# Altium PCB AT long bus with break-away tab (13.3 x 4.8 inches).PCBDOC
Units mil, origin at the board's own origin, x right, y up, seen from the top; angles counter-clockwise.
Board outline 13300 x 5550 mil, 10 copper layers (TopLayer, MidLayer1, MidLayer2, MidLayer3, MidLayer4, MidLayer5, MidLayer6, MidLayer7, MidLayer8, BottomLayer); 1 components, 0 nets, 137 pads, 0 vias.
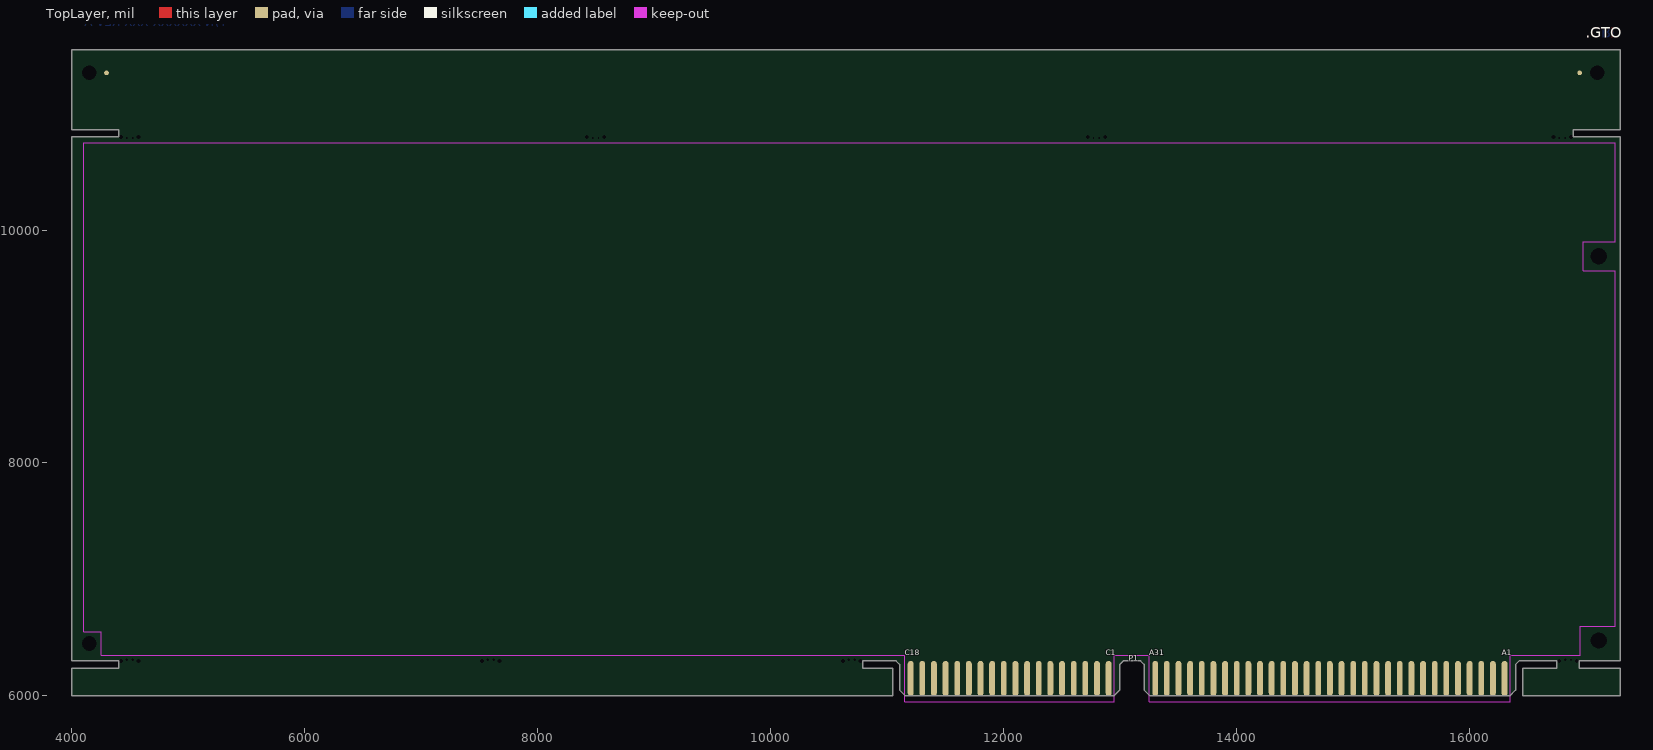
[diagram p0: TopLayer view]
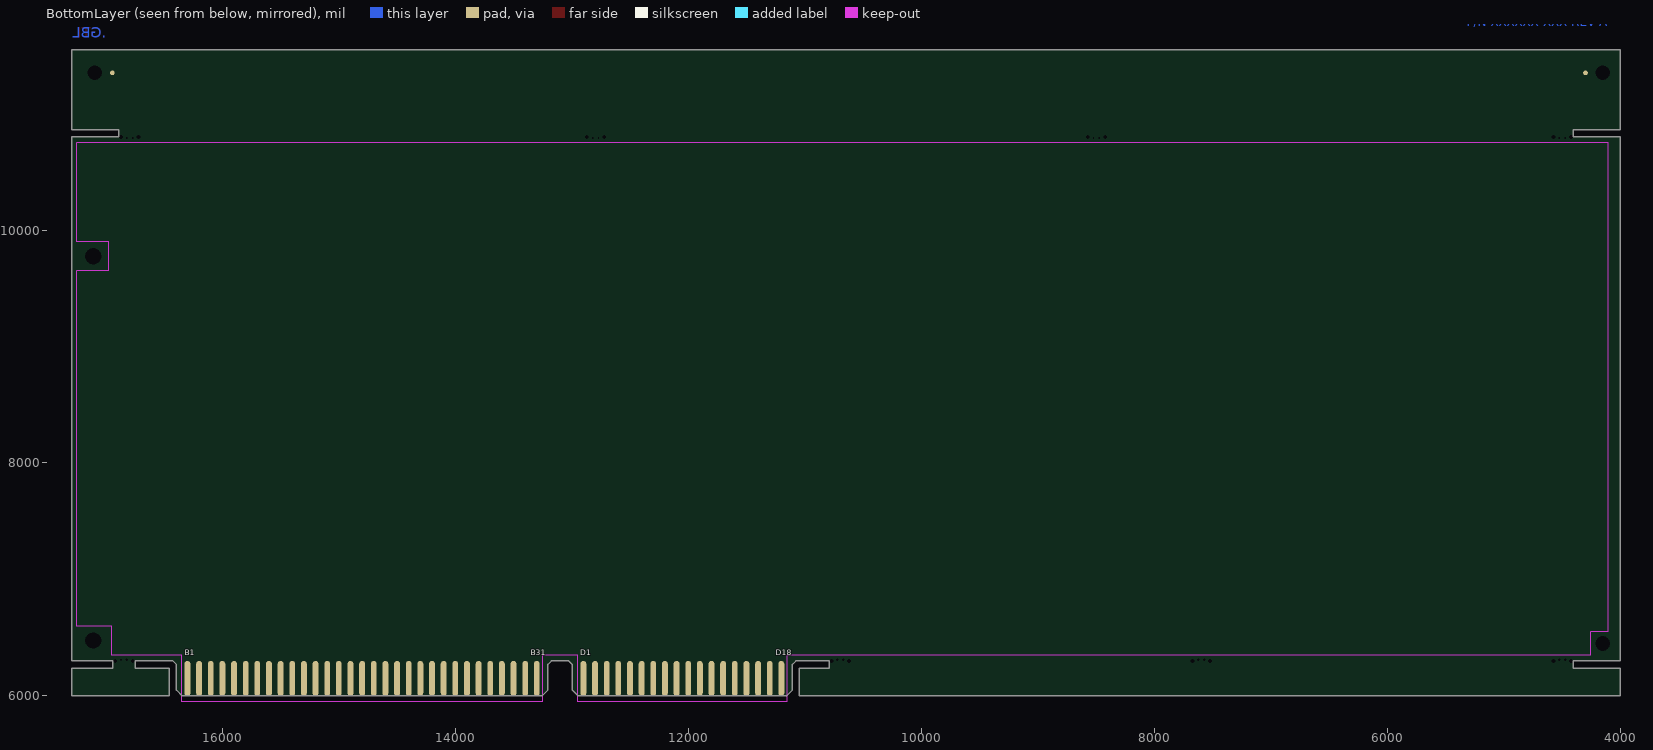
[diagram p1: BottomLayer view, seen from below]
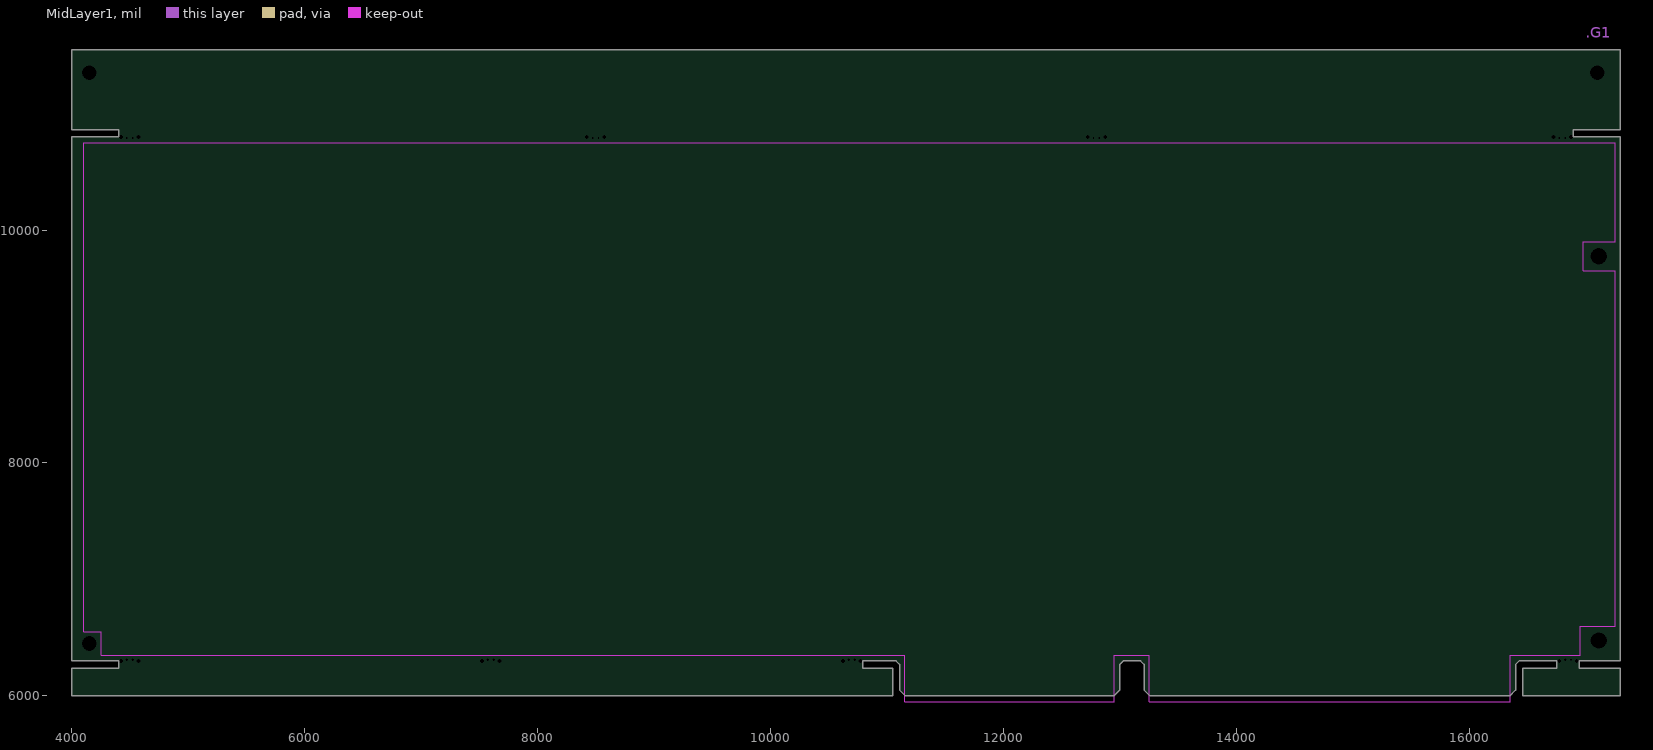
[diagram p2: MidLayer1]
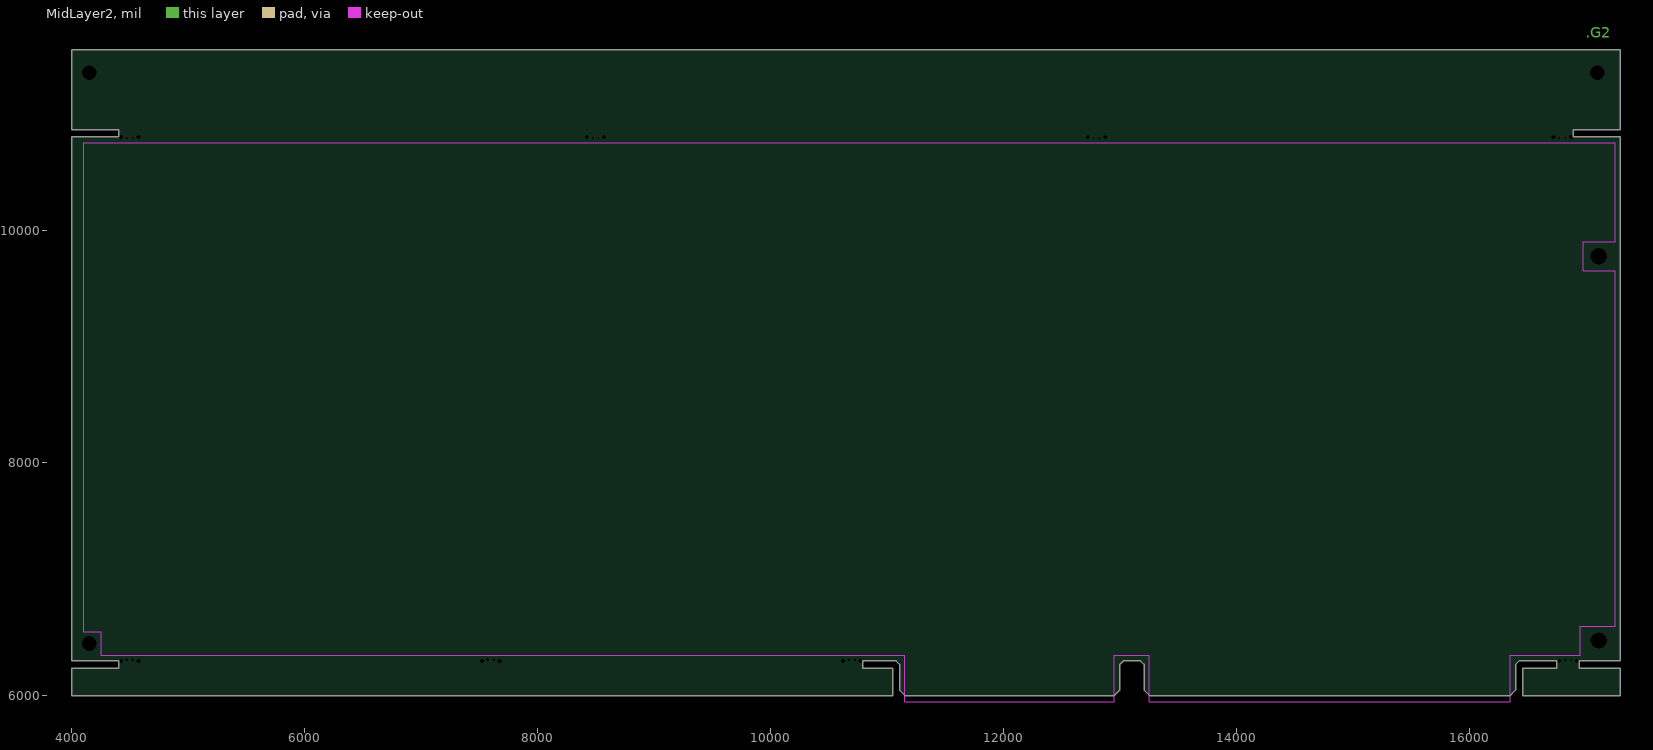
[diagram p3: MidLayer2]
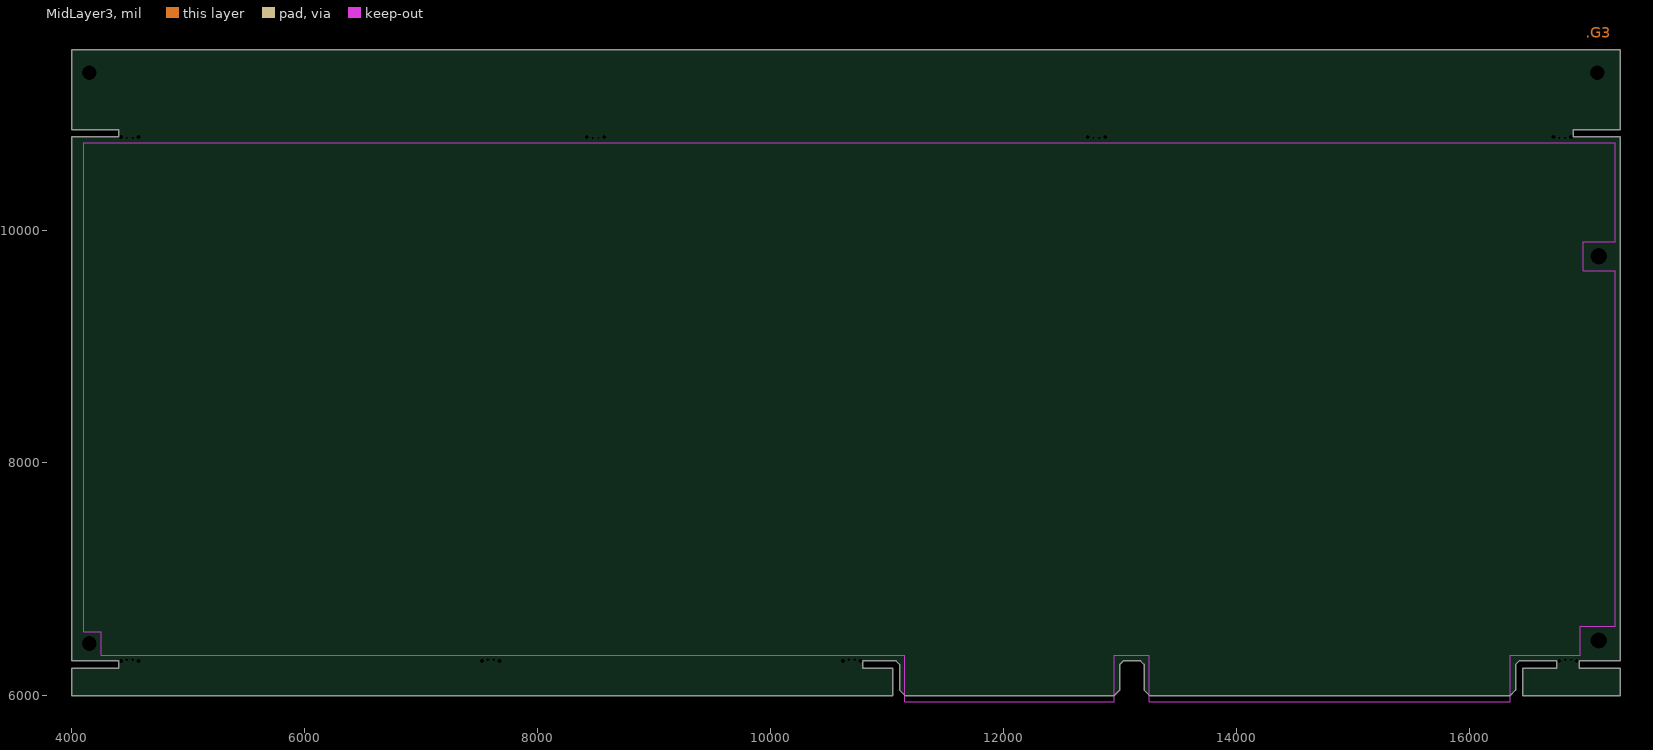
[diagram p4: MidLayer3]
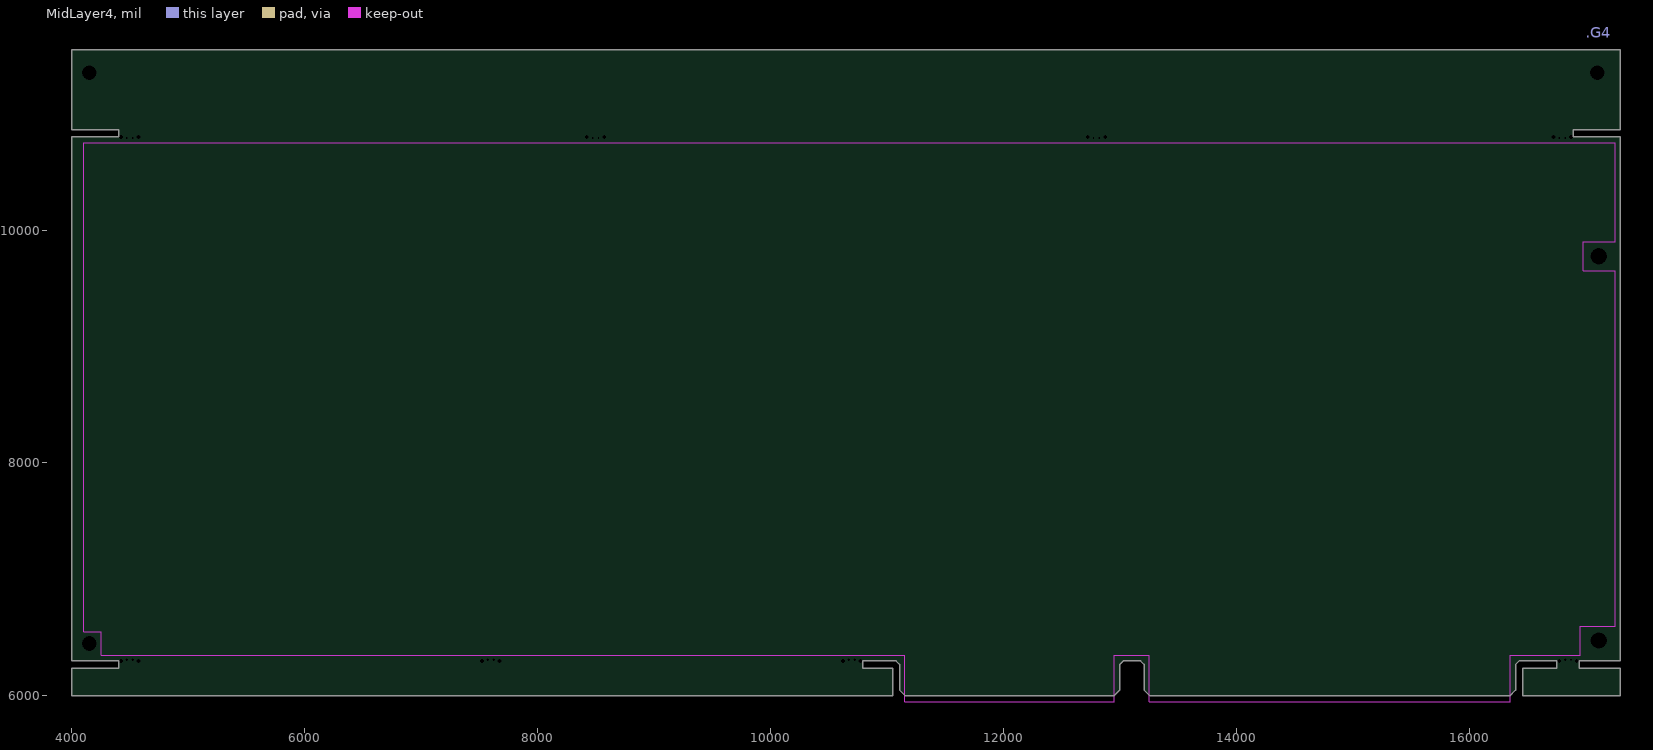
[diagram p5: MidLayer4]
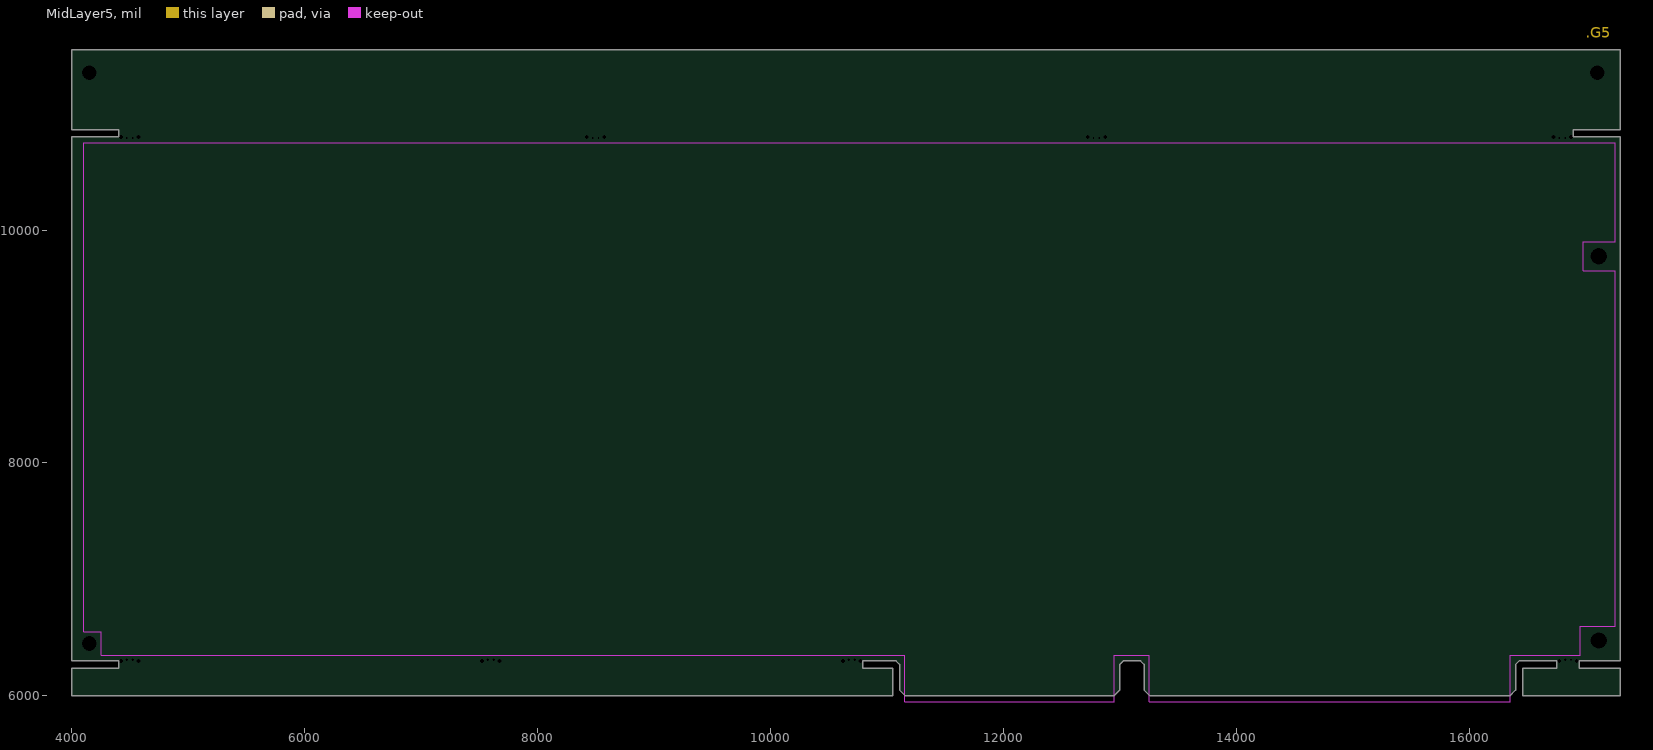
[diagram p6: MidLayer5]
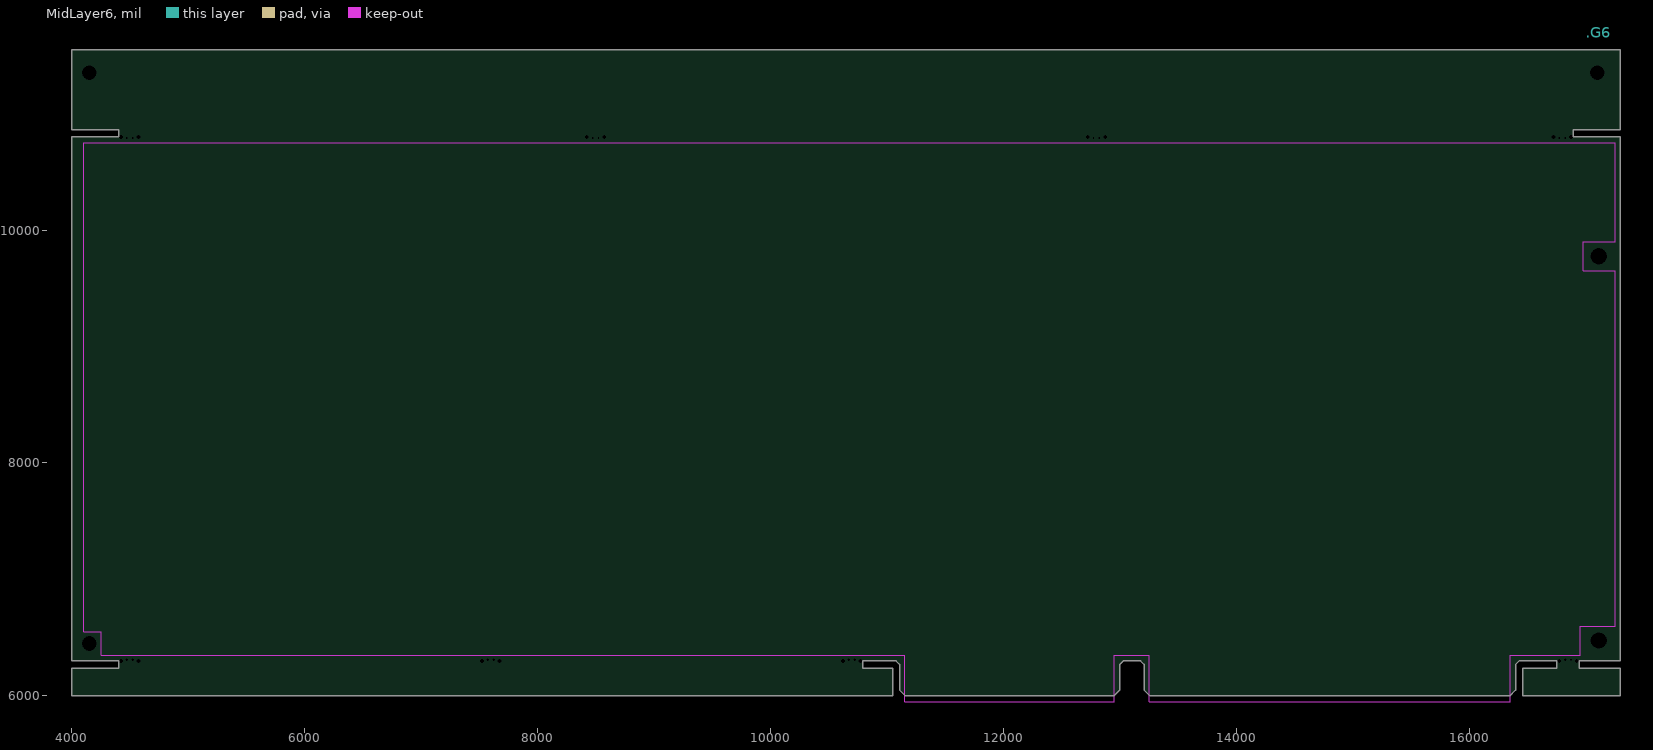
[diagram p7: MidLayer6]
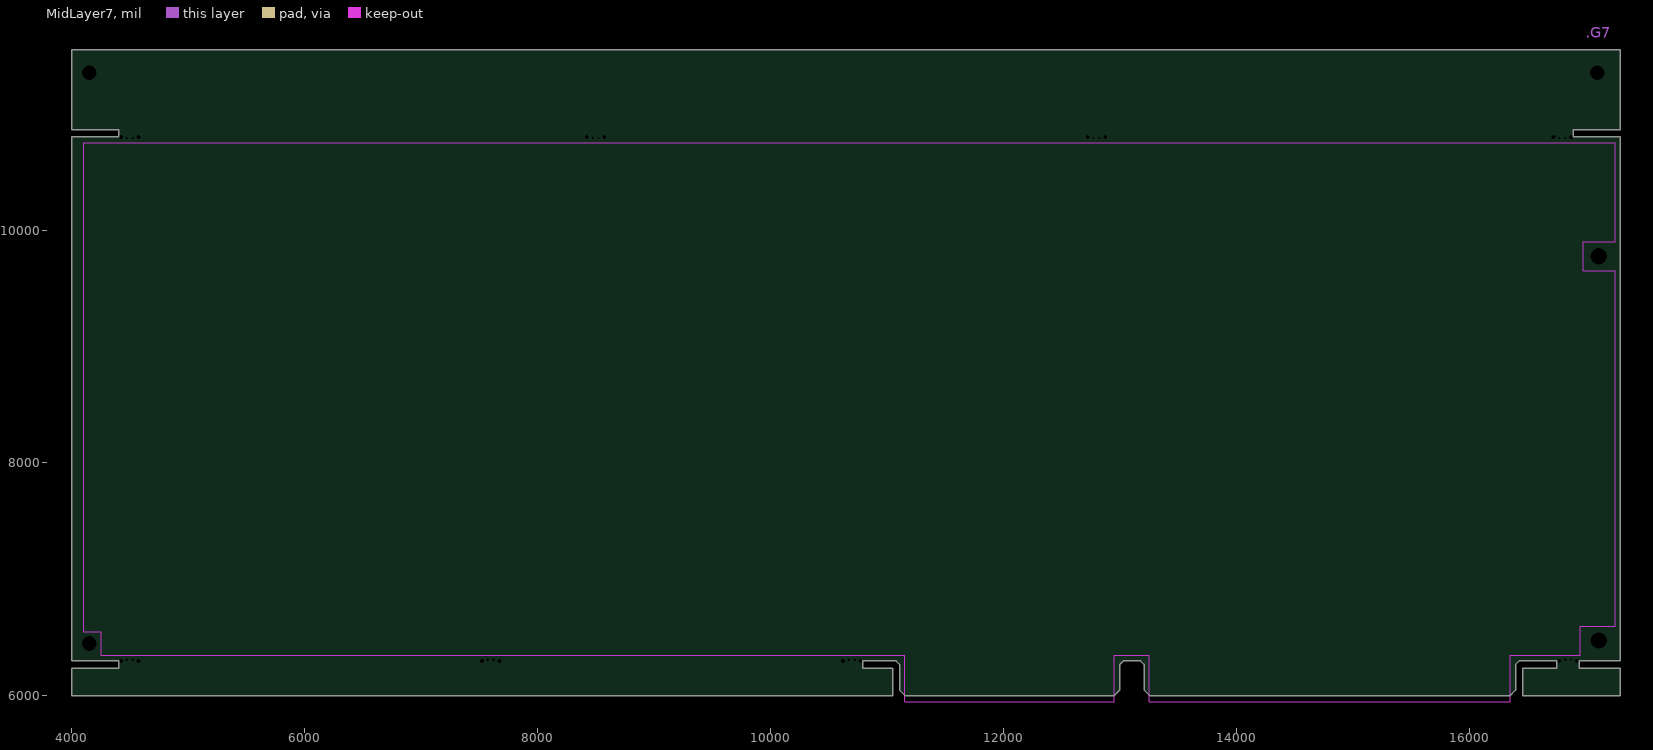
[diagram p8: MidLayer7]
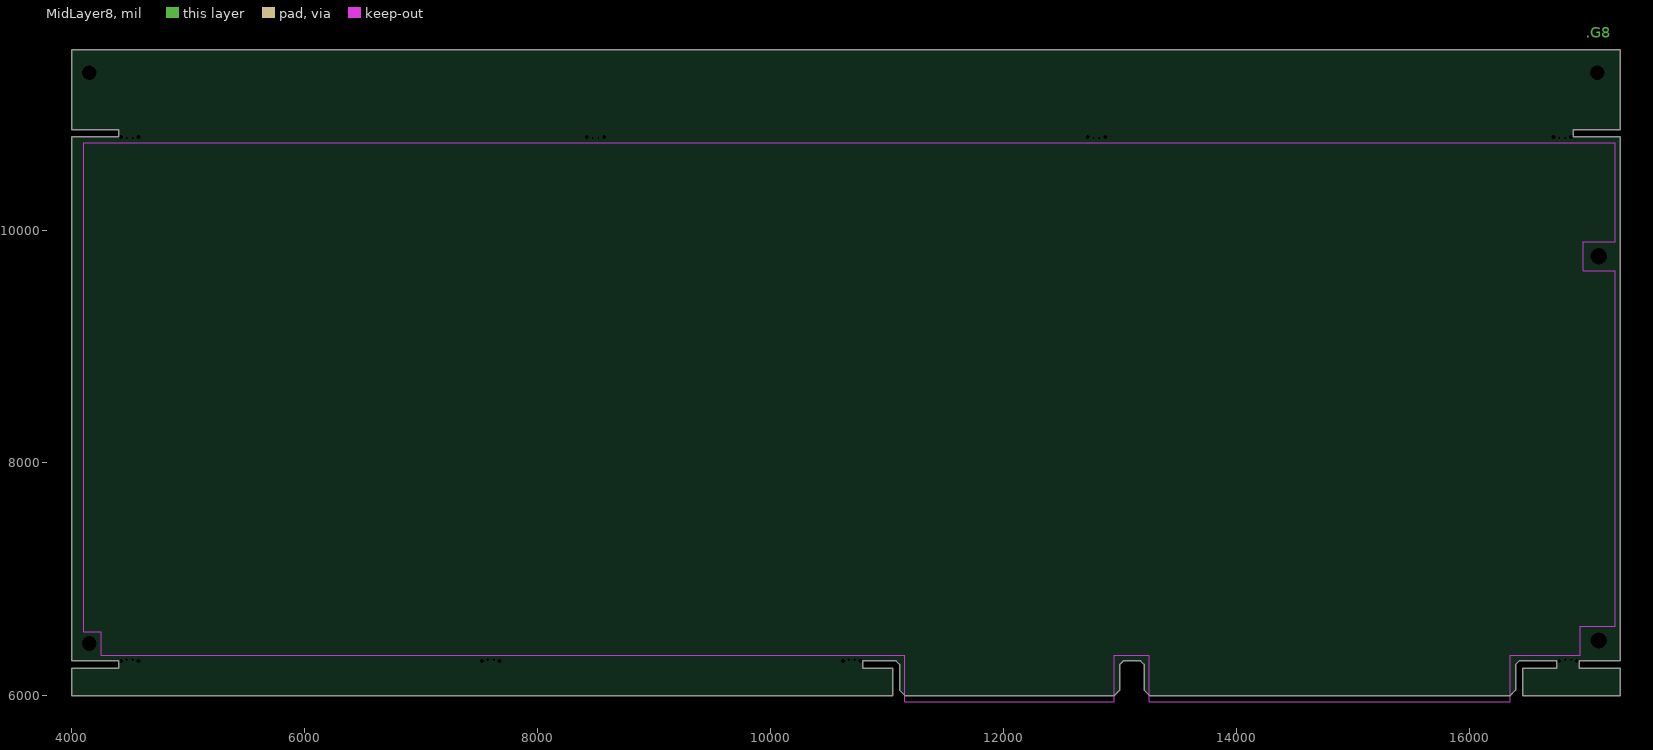
[diagram p9: MidLayer8]

## Layer stack, top to bottom
TopLayer: signal copper 1.4
Dielectric: core 12.6, FR-4, Dk 4.8
MidLayer1: signal copper 1.4
Dielectric: prepreg 12.6, FR-4, Dk 4.8
MidLayer2: signal copper 1.4
Dielectric: core 12.6, FR-4, Dk 4.8
MidLayer3: signal copper 1.4
Dielectric: prepreg 12.6, FR-4, Dk 4.8
MidLayer4: signal copper 1.4
Dielectric: core 12.6, FR-4, Dk 4.8
MidLayer5: signal copper 1.4
Dielectric: prepreg 12.6, FR-4, Dk 4.8
MidLayer6: signal copper 1.4
Dielectric: core 12.6, FR-4, Dk 4.8
MidLayer7: signal copper 1.4
Dielectric: prepreg 12.6, FR-4, Dk 4.8
MidLayer8: signal copper 1.4
Dielectric: core 12.6, FR-4, Dk 4.8
BottomLayer: signal copper 1.4

## Board outline
4000,6000 11050,6000 11050,6238 10795,6238 10795,6300 11080,6300 11110,6270 11110,6050 11160,6000 12950,6000 13000,6050 13000,6270 13030,6300 13180,6300 13210,6270 13210,6050 13260,6000 16350,6000 16400,6050 16400,6270 16430,6300 16755,6300 16755,6238 16462,6238 16462,6000 17300,6000 17300,6238 16945,6238 16945,6300 17300,6300 17300,10800 16895,10800 16895,10860 17300,10860 17300,11550 4000,11550 4000,10862 4405,10862 4405,10800 4000,10800 4000,6300 4405,6300 4405,6238 4000,6238

## Design rules (kind name [scope] priority, off if disabled: settings)
Clearance [All] p1: gap=10
FabricationTestPointUsage TestPointUsage [All] p1: valid=0 allowmultiple=FALSE
FabricationTestpoint Testpoint [All] p1: side=3 testpointundercomponent=TRUE minsize=40 maxsize=100 preferedsize=60 minholesize=20 maxholesize=40 preferedholesize=32 testpointgrid=1 allowsidetop=TRUE allowsidebottom=TRUE usegrid=TRUE gridtolerance=0.01
PasteMaskExpansion PasteMaskExpansion_1 [InComponent('P1')] p1: expansion=-150
PasteMaskExpansion [All] p2: expansion=0
PlaneClearance [All] p1: clearance=10
PolygonConnect [All] p1: connectstyle=Relief reliefconductorwidth=10 reliefentries=4 polygonreliefangle="90 Angle"
RoutingVias [All] p1: holewidth=28 width=50 viastyle="Through Hole" minholewidth=28 minwidth=50 maxholewidth=28 maxwidth=50
SilkscreenOverComponentPads [All] p1: minsilkscreentomaskgap=10
SolderMaskExpansion SolderMaskExpansion_1 [HasPad('Free-34')] p1: expansion=20
SolderMaskExpansion [HasPad('Free-33')] p2: expansion=20
SolderMaskExpansion SolderMaskExpansion_2 [All] p3: expansion=2
Width [All] p1: maxlimit=10 minlimit=10 preferedwidth=10
23 further rules are at their usual default settings.

## Components (designator, comment, footprint, x,y, rotation, side; value= is the part's Value field where it differs from the comment)
P1 "PCATEDGE" PCATEDGE 16305,6150 r0 top locked

## Footprints (in the part's own frame and the unit in brackets; to place one, negate y for a bottom-side part, rotate by r counter-clockwise, add the part's x,y. Pads: shape width x height; smd on the part's side, far side on the other; paste and mask are expansions set on the pad)
PCATEDGE [mil]
  oval 50x300 smd: A1(0,0) A2(-100,0) A3(-200,0) A4(-300,0) A5(-400,0) A6(-500,0) A7(-600,0) A8(-700,0) A9(-800,0) A10(-900,0) A11(-1000,0) A12(-1100,0) A13(-1200,0) A14(-1300,0) A15(-1400,0) A16(-1500,0) A17(-1600,0) A18(-1700,0) A19(-1800,0) A20(-1900,0) A21(-2000,0) A22(-2100,0) A23(-2200,0) A24(-2300,0) A25(-2400,0) A26(-2500,0) A27(-2600,0) A28(-2700,0) A29(-2800,0) A30(-2900,0) A31(-3000,0) C1(-3400,0) C2(-3500,0) C3(-3600,0) C4(-3700,0) C5(-3800,0) C6(-3900,0) C7(-4000,0) C8(-4100,0) C9(-4200,0) C10(-4300,0) C11(-4400,0) C12(-4500,0) C13(-4600,0) C14(-4700,0) C15(-4800,0) C16(-4900,0) C17(-5000,0) C18(-5100,0)
  oval 50x300 smd far side: B1(0,0) B2(-100,0) B3(-200,0) B4(-300,0) B5(-400,0) B6(-500,0) B7(-600,0) B8(-700,0) B9(-800,0) B10(-900,0) B11(-1000,0) B12(-1100,0) B13(-1200,0) B14(-1300,0) B15(-1400,0) B16(-1500,0) B17(-1600,0) B18(-1700,0) B19(-1800,0) B20(-1900,0) B21(-2000,0) B22(-2100,0) B23(-2200,0) B24(-2300,0) B25(-2400,0) B26(-2500,0) B27(-2600,0) B28(-2700,0) B29(-2800,0) B30(-2900,0) B31(-3000,0) D1(-3400,0) D2(-3500,0) D3(-3600,0) D4(-3700,0) D5(-3800,0) D6(-3900,0) D7(-4000,0) D8(-4100,0) D9(-4200,0) D10(-4300,0) D11(-4400,0) D12(-4500,0) D13(-4600,0) D14(-4700,0) D15(-4800,0) D16(-4900,0) D17(-5000,0) D18(-5100,0)

## Free pads (board coordinates)
  round 0 hole 32: 1(4575,6300) 4(4425,6300) 5(7675,6300) 8(7525,6300) 9(10775,6300) 12(10625,6300) 13(16925,6300) 16(16775,6300) 17(4425,10800) 20(4575,10800) 21(8425,10800) 24(8575,10800) 25(12725,10800) 28(12875,10800) 29(16725,10800) 32(16875,10800)
  round 0 hole 20: 2(4525,6310) 3(4475,6310) 6(7625,6310) 7(7575,6310) 10(10725,6310) 11(10675,6310) 14(16875,6310) 15(16825,6310) 18(4475,10790) 19(4525,10790) 22(8475,10790) 23(8525,10790) 26(12775,10790) 27(12825,10790) 30(16775,10790) 31(16825,10790)
  round 40 / inner round 0 / far side round 40 all layers, no hole: 33(4300,11350) 34(16950,11350)
  round 50 hole 140: 35(17115,6475) 36(17115,9775)
  round 50 hole 125: 37(17100,11350) 38(4150,11350) 39(4150,6450)

## Nets (pads, with @x,y where several pads share a name; then routed paths per layer and width w, separated by ;. In a path a pad name is that pad's centre, name@x,y a point inside that pad or via, vN(x,y) a via of type N, cw(c..) or ccw(c..) an arc to the next point about the centre after c; other vN are vias at no path point)
pads on no net: P1.A1 P1.A2 P1.A3 P1.A4 P1.A5 P1.A6 P1.A7 P1.A8 P1.A9 P1.A10 P1.A11 P1.A12 P1.A13 P1.A14 P1.A15 P1.A16 P1.A17 P1.A18 P1.A19 P1.A20 P1.A21 P1.A22 P1.A23 P1.A24 P1.A25 P1.A26 P1.A27 P1.A28 P1.A29 P1.A30 P1.A31 P1.B1 P1.B2 P1.B3 P1.B4 P1.B5 P1.B6 P1.B7 P1.B8 P1.B9 P1.B10 P1.B11 P1.B12 P1.B13 P1.B14 P1.B15 P1.B16 P1.B17 P1.B18 P1.B19 P1.B20 P1.B21 P1.B22 P1.B23 P1.B24 P1.B25 P1.B26 P1.B27 P1.B28 P1.B29 P1.B30 P1.B31 P1.C1 P1.C2 P1.C3 P1.C4 P1.C5 P1.C6 P1.C7 P1.C8 P1.C9 P1.C10 P1.C11 P1.C12 P1.C13 P1.C14 P1.C15 P1.C16 P1.C17 P1.C18 P1.D1 P1.D2 P1.D3 P1.D4 P1.D5 P1.D6 P1.D7 P1.D8 P1.D9 P1.D10 P1.D11 P1.D12 P1.D13 P1.D14 P1.D15 P1.D16 P1.D17 P1.D18

## Keep-outs
KeepOutLayer:
  lines w8: 4105,6550 4105,10750 17255,10750 17255,9900 16980,9900 16980,9650 17255,9650 17255,6600 16955,6600 16955,6350 16355,6350 16355,5950 13255,5950 13255,6350 12955,6350 12955,5950 11155,5950 11155,6350 4255,6350 4255,6550 4105,6550

## Other copper
TopLayer:
  text ".GTL" at 17000,11650 h90
MidLayer1:
  text ".G1" at 17000,11650 h90
MidLayer2:
  text ".G2" at 17000,11650 h90
MidLayer3:
  text ".G3" at 17000,11650 h90
MidLayer4:
  text ".G4" at 17000,11650 h90
MidLayer5:
  text ".G5" at 17000,11650 h90
MidLayer6:
  text ".G6" at 17000,11650 h90
MidLayer7:
  text ".G7" at 17000,11650 h90
MidLayer8:
  text ".G8" at 17000,11650 h90
BottomLayer:
  text "P/N XXXXXX-XXX REV A" at 5320,11750 h75
  text ".GBL" at 17000,11650 h90

## Silkscreen, mask and mechanical layers (free items; w line width, h text height)
TopOverlay:
  rectangle: 4281,11953 5031,12153
  rectangle: 4281,12243 5031,12443
  lines w10: 5392.59,12345.97 ccw(c5441,12385.5) 5392.71,12345.83
  text "C" at 5496,12348 h60
  text "2002 COMPANY NAME" at 5646,12348 h75
  text "S/N" at 4031,12300.5 h75
  text "BOARD NAME" at 5496,12173 h75
  text "ASSY NO.: XXXXXX" at 5496,12023 h75
  text "REV" at 4031,12003 h75
  text ".GTO" at 17000,11650 h90
TopPaste:
  text ".GTP" at 17000,11650 h90
BottomPaste:
  text ".GBP" at 17000,11650 h90
TopSolder:
  rectangle: 11085,5975 13025,6305
  rectangle: 13185,5975 16425,6305
  text ".GTS" at 17000,11650 h90
BottomSolder:
  rectangle: 11085,5975 13025,6305
  rectangle: 13185,5975 16425,6305
  text ".GBS" at 17000,11650 h90
Mechanical1:
  lines w20: 4000,6000 4000,6238 4405,6238 4405,6300 4000,6300 4000,10800 4405,10800 4405,10862 4000,10862 4000,11550 17300,11550 17300,10860 16895,10860 16895,10800 17300,10800 17300,6300 16945,6300 16945,6238 17300,6238 17300,6000 16462,6000 16462,6238 16755,6238 16755,6300 16430,6300 16400,6270 16400,6050 16350,6000 13260,6000 13210,6050 13210,6270 13180,6300 13030,6300 13000,6270 13000,6050 12950,6000 11160,6000 11110,6050 11110,6270 11080,6300 10795,6300 10795,6238 11050,6238 11050,6000 4000,6000 ; 4595,6238 4595,6300 7505,6300 7505,6238 4595,6238 ; 4595,10800 4595,10862 8405,10862 8405,10800 4595,10800 ; 7695,6238 7695,6300 10605,6300 10605,6238 7695,6238 ; 8595,10800 8595,10862 12705,10862 12705,10800 8595,10800 ; 12895,10800 12895,10862 16705,10862 16705,10800 12895,10800
Mechanical3:
  lines w10: 16990,6425 16990,6375 17040,6375 ; 16990,6450 16990,6500 ; 16990,6525 16990,6575 17040,6575 ; 16990,9725 16990,9675 17040,9675 ; 16990,9750 16990,9800 ; 16990,9825 16990,9875 17040,9875 ; 17065,6375 17115,6375 ; 17065,6575 17115,6575 ; 17065,9675 17115,9675 ; 17065,9875 17115,9875 ; 17140,6375 17190,6375 ; 17140,6575 17190,6575 ; 17140,9675 17190,9675 ; 17140,9875 17190,9875 ; 17215,6375 17265,6375 ; 17215,6575 17265,6575 ; 17215,9675 17265,9675 ; 17215,9875 17265,9875 ; 17300,6375 17340,6375 17340,5225 17365,5225 17365,9950 17790,9950 17790,9975 17340,9975 17340,9875 17300,9875 ; 17300,6575 17340,6575 17340,9675 17300,9675
Mechanical4:
  circle w10: c11165.68,6020.67 r100
  lines w10: 18405,8100 18480,8025 18555,8100 18630,8025 18705,8100 18780,8025 18855,8100 ; 18886.25,7018.75 19130,6775 19330,6775 ; 20030,8225 20755,8225 ; 21380,6775 21130,6775 21423.75,7068.75 ; 22330,6975 22330,7375 22530,7475 22130,7575 22330,7675 22330,8075 ; 11130,5880 11183.84,5878.87 11133.21,5900.36 11130,5880 ; 11183.68,5878.67 11233.68,5898.67 11238.68,5878.67 11183.68,5878.67 ; 18780,7125 18905,7037.5 18867.5,7000 18780,7125 ; 21405,7087.5 21530,7175 21442.5,7050 21405,7087.5
  lines w20: 18430,8075 18430,7175 18530,7075 18730,7075 18830,7175 18830,8075 ; 21430,8075 21430,7275 21630,7075 22330,7075
  text ".Pcb_File_Name_No_Path" at 15100,11840 h90
  text ".Printout_Name" at 15100,11650 h90
  text "DETAIL A" at 20030,8275 h120
  text "o" at 20055,6800 h60
  text "o" at 22105,6800 h60
  text ".020 X 45  CHAMFER" at 19405,6725 h90
  text "0.05 X 45  CHAMFER" at 21455,6725 h90
  text "BOTH SIDES" at 19405,6550 h90
  text "TYP 4 PLCS" at 21455,6550 h90
  text "ENTIRE LENGTH OF" at 19405,6375 h90
  text "EDGE CONNECTOR" at 19405,6200 h90
  text "SEE DETAIL A" at 11260,5850 h75
DrillDrawing:
  text ".LEGEND" at 18335,8955 h90
  text "Drilling Details." at 18340,8785 h90

## Dimensions
3980,6450 to 4000,6300 on Mechanical4
4150,5980 to 4000,6000 on Mechanical4

## Text inside footprints (layer, text, board x,y; h text height)
P1: TopOverlay "A31" at 13255,6350 h48; TopOverlay "C18" at 11155,6350 h48; TopOverlay "C1" at 12880,6350 h48; TopOverlay "A1" at 16280,6350 h48; BottomOverlay "B1" at 16330,6350 h48; BottomOverlay "B31" at 13355,6350 h48; BottomOverlay "D1" at 12930,6350 h48; BottomOverlay "D18" at 11255,6350 h48